# EAGLE board Bio_v4_LCD0_2_pan (EAGLE 7.5.0)
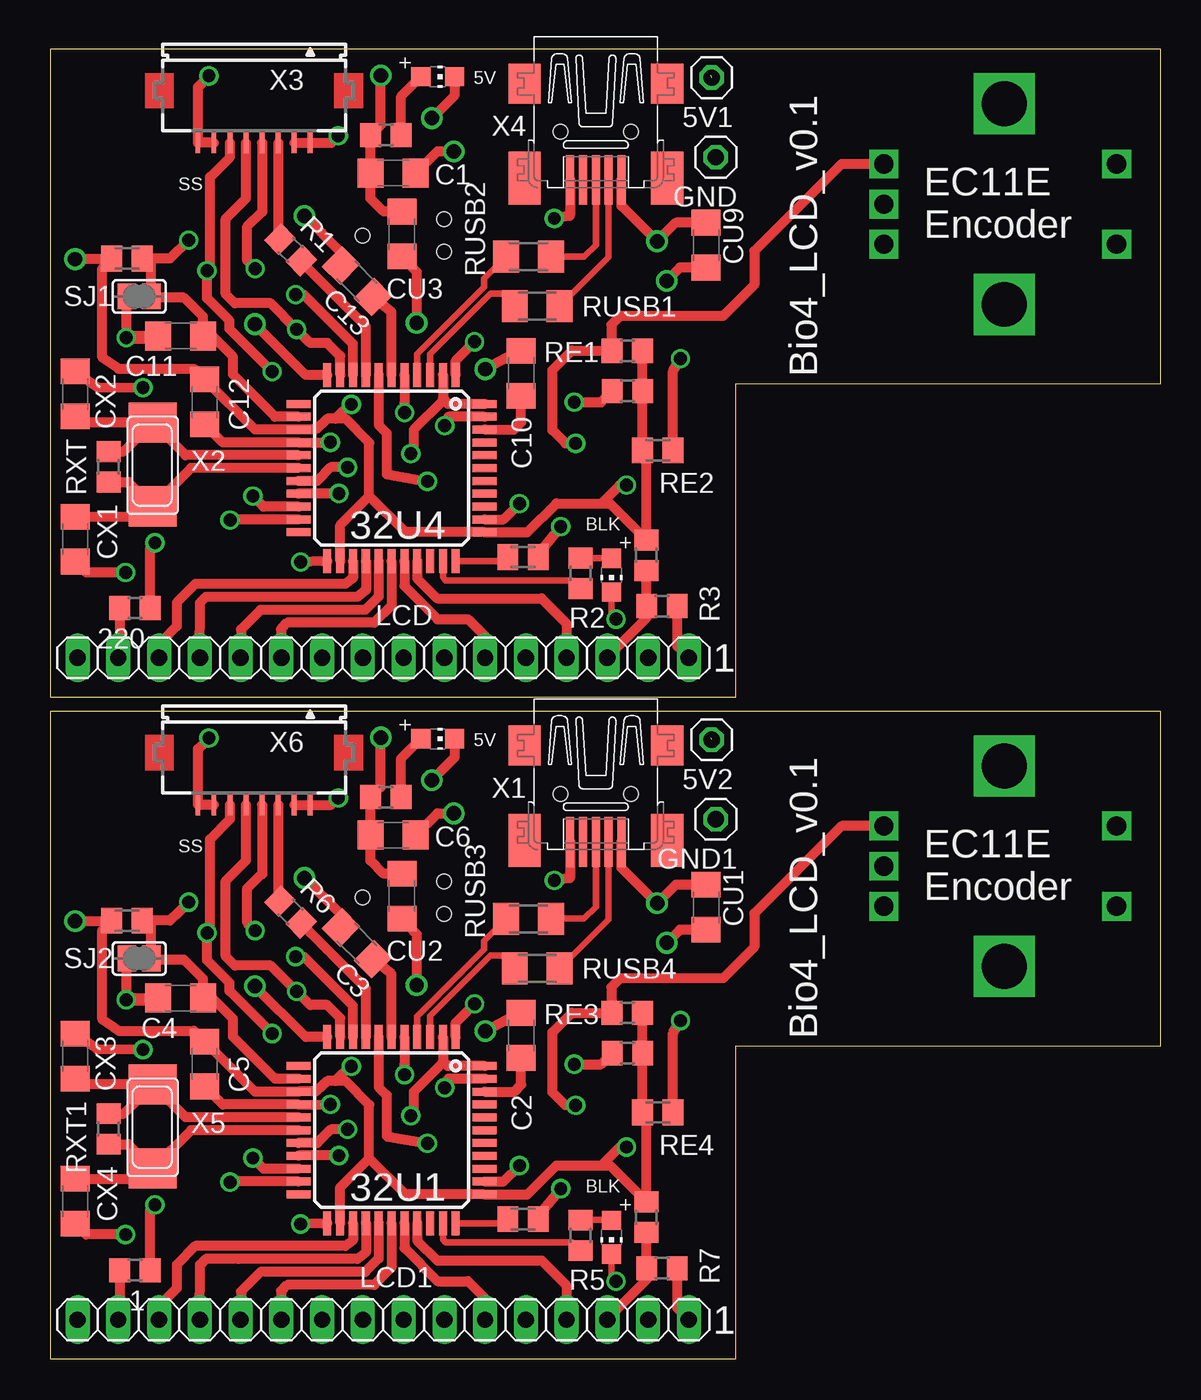
[diagram p0: board, top side]
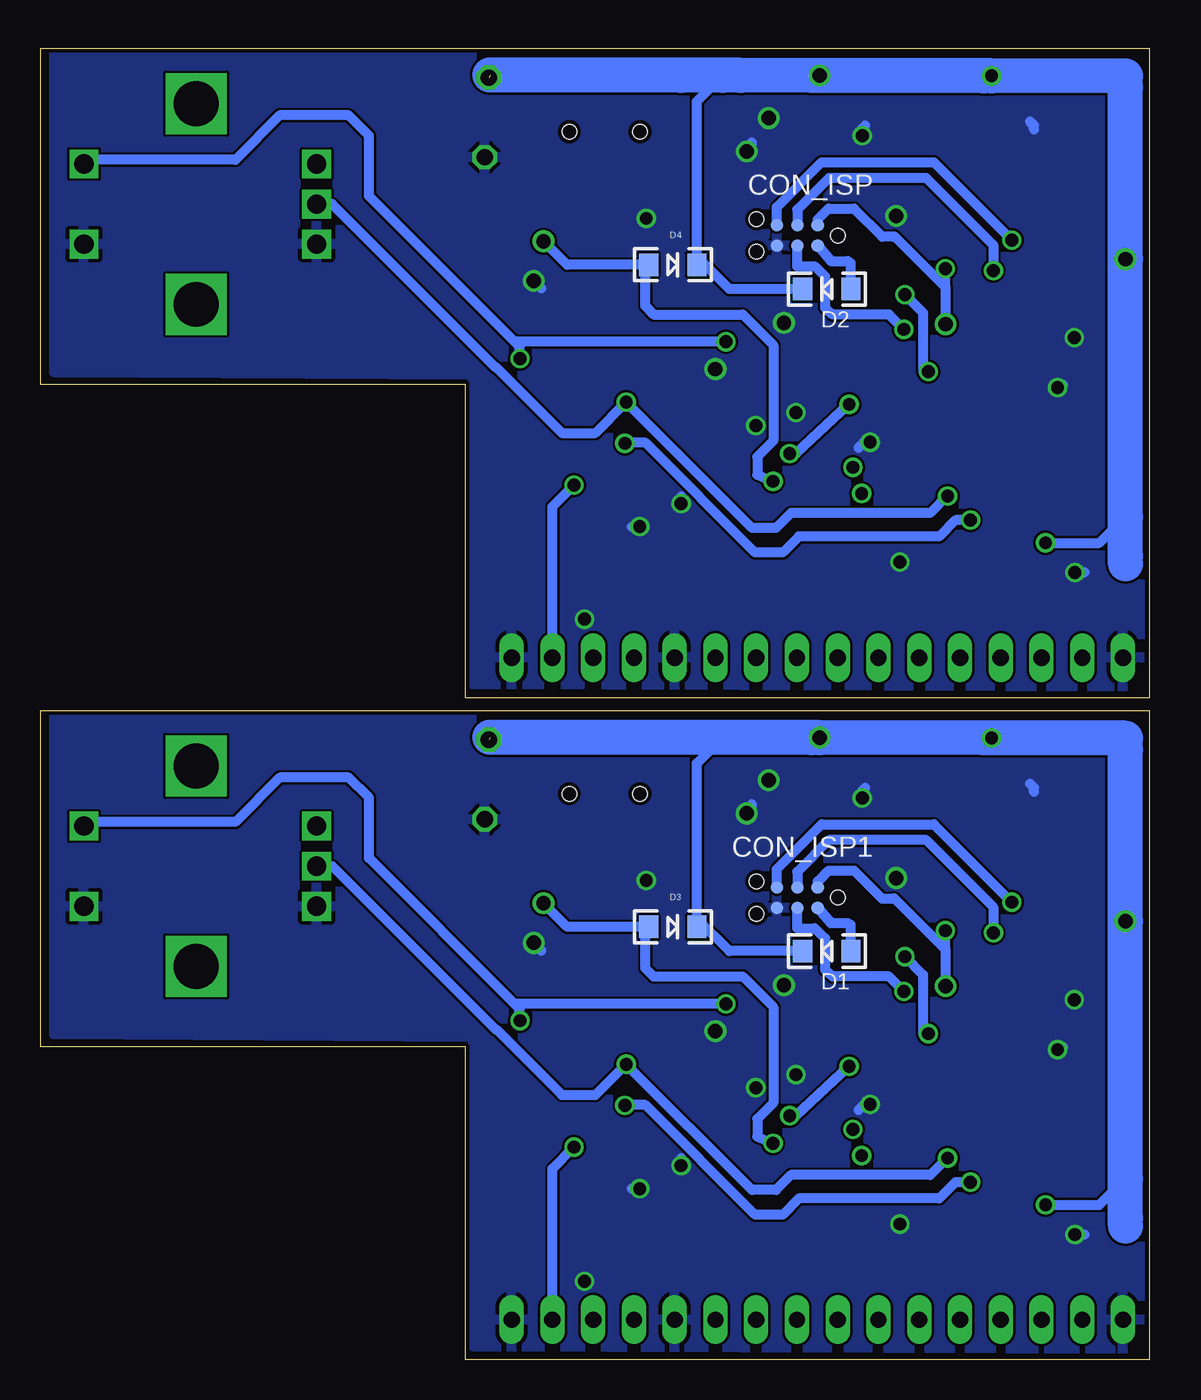
[diagram p1: board, bottom side, seen from below]

Size 69.15 x 81.66 mm. Coordinates in mm from the lower left corner, seen from the top.
Outline: 42.66,41.26 0,41.26 0,81.66 69.15,81.66 69.15,60.78 42.66,60.78 42.66,41.26
Outline: 42.66,0 0,0 0,40.41 69.15,40.41 69.15,19.52 42.66,19.52 42.66,0
Copper layers (1*2*15*16): Top 0.035mm / dielectric 0.2mm / layer 2 0.0175mm / dielectric 1.1mm / layer 15 0.0175mm / dielectric 0.2mm / Bottom 0.035mm
Design rules "SeeedStudio_DRU_no_angle_20130527": minimum track width 6mil, minimum drill 12mil, track to track 6mil, track to pad 6mil, pad to pad 6mil, via to via 6mil, smd to smd 0mil, copper to edge 10mil, drill to drill 10mil, minimum pad ring 6mil, minimum via ring 6mil, stop-mask expansion 2mil, vias tented up to drill 25mil, thermal gap 10mil
Net classes: 0 default: width 0.203 mm; 1 power: width 0.203 mm, drill 0.305 mm, clearance 0.152 mm; 2 VIN: width 0.457 mm; 3 fine: width 0.254 mm; 4 aref: width 0.356 mm
vRestrict: area 8.7,74.7 to 16.8,78.5; area 8.7,33.5 to 16.8,37.3

## Footprints (pad centres in the part's own frame; a part is rotated, then mirrored left to right if it is on the bottom)
R0805 = smd 1.3 x 1.5: 1 -0.95,0; 2 0.95,0
1X01 = drill 1.016 octagon: 1 0,0
TQFP44 = smd 1.5 x 0.5: 1 -5.8,4; 2 -5.8,3.2; 3 -5.8,2.4; 4 -5.8,1.6; 5 -5.8,0.8; 6 -5.8,0; 7 -5.8,-0.8; 8 -5.8,-1.6; 9 -5.8,-2.4; 10 -5.8,-3.2; 11 -5.8,-4; 23 5.8,-4; 24 5.8,-3.2; 25 5.8,-2.4; 26 5.8,-1.6; 27 5.8,-0.8; 28 5.8,0; 29 5.8,0.8; 30 5.8,1.6; 31 5.8,2.4; 32 5.8,3.2; 33 5.8,4 | smd 0.5 x 1.5: 12 -4,-5.8; 13 -3.2,-5.8; 14 -2.4,-5.8; 15 -1.6,-5.8; 16 -0.8,-5.8; 17 0,-5.8; 18 0.8,-5.8; 19 1.6,-5.8; 20 2.4,-5.8; 21 3.2,-5.8; 22 4,-5.8; 34 4,5.8; 35 3.2,5.8; 36 2.4,5.8; 37 1.6,5.8; 38 0.8,5.8; 39 0,5.8; 40 -0.8,5.8; 41 -1.6,5.8; 42 -2.4,5.8; 43 -3.2,5.8; 44 -4,5.8
CHIP-LED0805 = smd 1.2 x 1.2: A 0,-1.05; C 0,1.05
C1206 = smd 1.6 x 1.8: 1 -1.4,0; 2 1.4,0
TC2030-MCP-NL = smd 0.787 x 0.787: 5V 1.27,0.635; GND 3.81,0.635; MISO 1.27,-0.635; MOSI 2.54,0.635; RESET 3.81,-0.635; SCK 2.54,-0.635 | hole 0.889: 0,0; 5.08,-1.016; 5.08,1.016
LED-1206 = smd 1.2 x 1.4: A -1.5,0; C 1.5,0
1X16 = drill 1.016 long: 1 -19.05,0; 2 -16.51,0; 3 -13.97,0; 4 -11.43,0; 5 -8.89,0; 6 -6.35,0; 7 -3.81,0; 8 -1.27,0; 9 1.27,0; 10 3.81,0; 11 6.35,0; 12 8.89,0; 13 11.43,0; 14 13.97,0; 15 16.51,0; 16 19.05,0
M0805 = smd 1.3 x 1.6: 1 -0.95,0; 2 0.95,0
M1206 = smd 1.6 x 2: 1 -1.4,0; 2 1.4,0
SJ = smd 1.168 x 1.6: 1 -0.762,0; 2 0.762,0
EC11E = drill 1.2 square: A -2.5,0; B 0,0; C 2.5,0; D -2.5,14.5; E 2.5,14.5 | drill 2.8 square: P$1 6.25,7.5; P$2 -6.25,7.5
32005-201 = smd 3.1 x 0.5: 1 3,1.6; 2 3,0.8; 3 3,0; 4 3,-0.8; 5 3,-1.6 | smd 2.5 x 2: M1 -3,-4.45; M2 -3,4.45 | smd 3.3 x 2: M3 2.9,4.45; M4 2.9,-4.45 | hole 0.9: 0,2.2; 0,-2.2
NX6035 = smd 2.5 x 3: P$1 2.665,0; P$2 -2.565,0
FH12-08S-1SH = smd 0.3 x 1.3: 1 -3.5,3.25; 2 -2.5,3.25; 3 -1.5,3.25; 4 -0.5,3.25; 5 0.5,3.25; 6 1.5,3.25; 7 2.5,3.25; 8 3.5,3.25

## Placement (x,y rotation side)
1  220  [R0805]  5.25,5.56 180 top
5V1  [1X01]  41.19,79.87 180 top
5V2  [1X01]  41.19,38.61 180 top
32U1  32U4  [TQFP44]  21.24,14.29 270 top
32U4  32U4  [TQFP44]  21.24,55.54 270 top
220  220  [R0805]  5.25,46.82 180 top
BKLD  RED  [CHIP-LED0805]  34.95,48.87 180 top
BKLD1  RED  [CHIP-LED0805]  34.95,7.61 180 top
C1  100nF  [C1206]  21.34,73.93 0 top
C2  100nF  [C1206]  29.32,20.19 90 top
C3  100nF  [C1206]  19.08,25.93 315 top
C4  100nF  [C1206]  8.1,22.52 180 top
C5  100nF  [C1206]  9.6,18.41 90 top
C6  100nF  [C1206]  21.34,32.67 0 top
C10  100nF  [C1206]  29.32,61.45 90 top
C11  100nF  [C1206]  8.1,63.77 180 top
C12  100nF  [C1206]  9.6,59.67 90 top
C13  100nF  [C1206]  19.08,67.19 315 top
CON_ISP  SPI  [TC2030-MCP-NL]  19.43,70.04 180 bottom
CON_ISP1  SPI  [TC2030-MCP-NL]  19.43,28.78 180 bottom
CU1  10uF  [C1206]  40.84,28.18 90 top
CU2  10uF  [C1206]  21.88,28.87 270 top
CU3  10uF  [C1206]  21.88,70.12 270 top
CU9  10uF  [C1206]  40.84,69.43 90 top
CX1  22pF  [C1206]  1.53,51.11 90 top
CX2  22pF  [C1206]  1.52,60.16 270 top
CX3  22pF  [C1206]  1.52,18.9 270 top
CX4  22pF  [C1206]  1.53,9.86 90 top
D1  1N581D1206  [LED-1206]  20.12,25.44 180 bottom
D2  1N581D1206  [LED-1206]  20.12,66.7 180 bottom
D3  1N581D1206  [LED-1206]  29.73,26.95 0 bottom
D4  1N581D1206  [LED-1206]  29.73,68.21 0 bottom
GND  [1X01]  41.45,74.91 180 top
GND1  [1X01]  41.45,33.66 180 top
LCD  [1X16]  20.72,43.73 180 top
LCD1  [1X16]  20.72,2.47 180 top
LDPW1  RED  [CHIP-LED0805]  24.11,38.67 270 top
LDPW5  RED  [CHIP-LED0805]  24.11,79.93 270 top
R1  1k  [R0805]  14.95,69.14 315 top
R2  1k  [R0805]  33.01,48.99 90 top
R3  1k  [R0805]  38.09,46.94 0 top
R4  1k  [R0805]  20.89,35.04 0 top
R5  1k  [R0805]  33.01,7.73 90 top
R6  1k  [R0805]  14.95,27.88 315 top
R7  1k  [R0805]  38.09,5.68 0 top
R13  1k  [R0805]  20.89,76.29 0 top
RE1  5k  [R0805]  35.93,62.85 180 top
RE2  5k  [R0805]  35.94,60.34 180 top
RE3  5k  [R0805]  35.93,21.59 180 top
RE4  5k  [R0805]  35.94,19.09 180 top
RK1  10k  [R0805]  37.12,50.12 270 top
RK2  10k  [M0805]  37.84,56.65 180 top
RK3  10k  [M0805]  29.43,8.74 180 top
RK4  10k  [M0805]  4.76,27.34 180 top
RK5  10k  [R0805]  37.12,8.86 270 top
RK6  10k  [M0805]  4.76,68.6 180 top
RK7  10k  [M0805]  29.43,50 180 top
RK8  10k  [M0805]  37.84,15.39 180 top
RUSB1  22  [M1206]  30.31,65.63 0 top
RUSB2  22  [M1206]  29.77,68.71 0 top
RUSB3  22  [M1206]  29.77,27.45 0 top
RUSB4  22  [M1206]  30.31,24.38 0 top
RXT  1M  [R0805]  3.6,55.62 270 top
RXT1  1M  [R0805]  3.6,14.37 270 top
SJ1  [SJ]  5.51,66.24 0 top
SJ2  [SJ]  5.51,24.98 0 top
U$1  EC11E  [EC11E]  51.92,71.99 270 top
U$2  EC11E  [EC11E]  51.92,30.74 270 top
X1  MINI-USB  [32005-201]  33.97,35.25 270 top
X2  16MHz  [NX6035]  6.36,55.72 90 top
X3  FH12-08S-1SH  [FH12-08S-1SH]  12.67,79.06 180 top
X4  MINI-USB  [32005-201]  33.97,76.51 270 top
X5  16MHz  [NX6035]  6.36,14.46 90 top
X6  FH12-08S-1SH  [FH12-08S-1SH]  12.67,37.81 180 top

## Library data of the parts
1 220 C1-C6 C10-C13 CU1-CU3 CU9 CX1-CX4 R1-R3 R5-R7 RE1-RE4 RK1 RK5 RXT RXT1 = rcl
5V1 5V2 GND GND1 = Headerlibrary
32U1 32U4 BKLD BKLD1 LDPW1 LDPW5 = adafruit
CON_ISP CON_ISP1 D1-D4 LCD LCD1 U$1 U$2 X2 X5 = lpatiny
R4 R13 RK2-RK4 RK6-RK8 RUSB1-RUSB4 = resistor
SJ1 SJ2 = jumper
X1 X4 = con-cypressindustries; OC_FARNELL: unknown; OC_NEWARK: unknown
X3 X6 = con-hirose; OC_FARNELL: unknown; OC_NEWARK: unknown

## Nets
+5V/1 [fine]: 5V1.1 32U4.2 32U4.14 32U4.24 32U4.34 32U4.44 220.1 C1.1 C12.2 CU3.1 D2.C D4.C LCD.2 R13.1 RE1.1 RE2.1 RK1.1 RK2.2 RK6.2 X3.7 X3.8
+5V/2 [fine]: 1.1 5V2.1 32U1.2 32U1.14 32U1.24 32U1.34 32U1.44 C5.2 C6.1 CU2.1 D1.C D3.C LCD1.2 R4.1 RE3.1 RE4.1 RK4.2 RK5.1 RK8.2 X6.7 X6.8
A0: 32U4.36
A1: 32U4.37
A2: 32U4.38
A3: 32U4.39
A4: 32U4.40
A5: 32U4.41
A6: 32U4.25 LCD.14
A7: 32U1.38
A8: 32U1.39
A9: 32U1.40
A10: 32U1.41
A11: 32U1.37
A12: 32U1.36
A13: 32U1.25 LCD1.14
AREF: 32U4.42 C10.1
AREF1: 32U1.42 C2.1
CS_32U1: R6.1 X6.3
CS_32U4: R1.1 X3.3
D5*: 32U4.31
D5*1: 32U1.31
D6*: 32U4.27 LCD.12
D6*1: 32U1.27 LCD1.12
D7*: 32U4.1 RK2.1 U$1.D
D7*1: 32U1.1 RK8.1 U$2.D
D8*: 32U4.28 LCD.11
D8*1: 32U1.28 LCD1.11
D9*: 32U4.29 LCD.6
D9*1: 32U1.29 LCD1.6
D10*: 32U4.30 LCD.4
D10*1: 32U1.30 LCD1.4
D11*: 32U4.12
D11*1: 32U1.12
D12*: 32U4.26 LCD.13
D12*1: 32U1.26 LCD1.13
D13*: 32U4.32 R2.1
D13*1: 32U1.32 R5.1
GND [power]: 32U4.5 32U4.15 32U4.23 32U4.35 32U4.43 BKLD.C C1.2 C10.2 C11.2 C12.1 C13.1 CON_ISP.GND CU3.2 CU9.1 CX1.1 CX2.1 GND.1 LCD.1 LCD.5 LCD.16 LDPW5.C R3.2 RK7.1 SJ1.1 U$1.C U$1.E X3.1 X3.2 X4.5
GND1 [power]: 32U1.5 32U1.15 32U1.23 32U1.35 32U1.43 BKLD1.C C2.2 C3.1 C4.2 C5.1 C6.2 CON_ISP1.GND CU1.1 CU2.2 CX3.1 CX4.1 GND1.1 LCD1.1 LCD1.5 LCD1.16 LDPW1.C R7.2 RK3.1 SJ2.1 U$2.C U$2.E X1.5 X6.1 X6.2
HWB: 32U4.33 RK7.2
HWB1: 32U1.33 RK3.2
ISP+5V: CON_ISP.5V D2.A
ISP+5V1: CON_ISP1.5V D1.A
MISO: 32U4.11 CON_ISP.MISO X3.4
MISO1: 32U1.11 CON_ISP1.MISO X6.4
MOSI: 32U4.10 CON_ISP.MOSI X3.5
MOSI1: 32U1.10 CON_ISP1.MOSI X6.5
N$1: 32U4.6 C13.2
N$2: LCD.3 R3.1 RK1.2
N$3: BKLD.A R2.2
N$4: LDPW1.A R4.2
N$5: BKLD1.A R5.2
N$6: 32U1.17 CX4.2 RXT1.2 X5.P$2
N$7: 32U1.6 C3.2
N$8: LCD1.3 R7.1 RK5.2
N$9: 1.2 LCD1.15
N$11: 220.2 LCD.15
N$12: LDPW5.A R13.2
N$42: 32U4.17 CX1.2 RXT.2 X2.P$2
RESET: 32U4.13 C11.1 CON_ISP.RESET RK6.1 SJ1.2
RESET1: 32U1.13 C4.1 CON_ISP1.RESET RK4.1 SJ2.2
RX: 32U4.20 RE2.2 U$1.B
RX1: 32U1.20 RE4.2 U$2.B
RXLED: 32U4.8 R1.2
RXLED1: 32U1.8 R6.2
SCK: 32U4.9 CON_ISP.SCK X3.6
SCK1: 32U1.9 CON_ISP1.SCK X6.6
SCL: 32U4.18
SCL1: 32U1.18
SDA: 32U4.19
SDA1: 32U1.19
TX: 32U4.21 RE1.2 U$1.A
TX1: 32U1.21 RE3.2 U$2.A
TXLED: 32U4.22
TXLED1: 32U1.22
USB_N: 32U4.3 RUSB1.1
USB_N1: 32U1.3 RUSB4.1
USB_P: 32U4.4 RUSB2.1
USB_P1: 32U1.4 RUSB3.1
USBC_N: RUSB1.2 X4.2
USBC_N1: RUSB4.2 X1.2
USBC_P: RUSB2.2 X4.3
USBC_P1: RUSB3.2 X1.3
VUSB: 32U4.7 CU9.2 D4.A X4.1
VUSB1: 32U1.7 CU1.2 D3.A X1.1
XTAL1: 32U4.16 CX2.2 RXT.1 X2.P$1
XTAL2: 32U1.16 CX3.2 RXT1.1 X5.P$1

## Tracks (layer width: path | path; a pad name or v marks a point on that pad's centre or on a via)
+5V/1  (via drill 0.8, 0.8 pad 0.81, 0.9, 0.9 pad 0.61)  (1 unrouted)
  Top 0.61: 32U4.24 18.04,51.98 19.85,53.79 | 19.85,53.79 19.85,57.12 18.36,58.61 17.73,58.61 | 17.73,58.61 17.23,58.61 16.51,57.95 15.45,57.95 32U4.14 12.73,57.94 C12.2 8.93,61.74 4.23,61.74 3.21,62.44 3.21,68 3.78,68.56 | 19.85,53.79 22.11,51.54 32U4.34 29.71,51.54 31.51,53.34 34.33,53.34 | 32U4.44 24.76,59.54 24.44,59.86 | 32U4.2 24.44,59.86 | 24.44,59.86 24.44,59.76 22.62,57.94 22.62,56.63 v22.44,56.44 | v18.74,59.52 18.74,59.62 17.73,58.61 | RK6.2 3.78,68.56 | 3.78,68.56 v1.52,68.56 | v20.56,80.01 20.56,76.92 R13.1 C1.1 19.93,72.34 20.75,71.52 CU3.1 | 34.33,53.34 34.84,53.34 RK1.1 | 220.1 6.2,50.59 v6.49,50.89 | RE1.1 RE2.1 RK2.2 37.12,56.42 RK1.1 | 36.89,51.29 RK1.1 | v35.88,54.49 35.47,54.49 34.33,53.34 | X3.7 X3.8 9.17,79.3 v9.86,79.98
  Bottom 0.61: v22.44,56.44 22.04,56.44 v18.74,59.52 | 1.52,79.26 1.52,79.61 1.88,79.97 | v20.56,80.01 v20.57,80.01 21.06,80.01 | v6.49,50.89 3.15,50.89 1.52,52.52 | LCD.2 37.23,53.14 v35.88,54.49 | D4.C 28.23,68.72 | 28.23,68.72 28.23,78.4 26.61,80.02 | D2.C 26.21,66.7 28.23,68.72 | v9.86,79.98 10.37,79.98
  Bottom 2.184: 1.52,49.57 1.52,50.06 1.52,52.52 v1.52,68.56 1.52,79.26 1.52,79.97 1.88,79.97 v9.86,79.98 10.37,79.98 v20.56,80.01 21.06,80.01 25.49,80.02 26.61,80.02 29.21,80.02 34.88,80.03 41.13,80.03
+5V/2  (via drill 0.8, 0.8 pad 0.81, 0.9, 0.9 pad 0.61)  (1 unrouted)
  Top 0.61: 32U1.24 18.04,10.72 19.85,12.54 | 19.85,12.54 19.85,15.86 18.36,17.35 17.73,17.35 | 17.73,17.35 17.23,17.35 16.51,16.69 15.45,16.69 32U1.14 12.73,16.69 C5.2 8.93,20.48 4.23,20.48 3.21,21.18 3.21,26.74 3.78,27.3 | 19.85,12.54 22.11,10.29 32U1.34 29.71,10.29 31.51,12.09 34.33,12.09 | 32U1.44 24.76,18.29 24.44,18.6 | 32U1.2 24.44,18.6 | 24.44,18.6 24.44,18.5 22.62,16.68 22.62,15.37 v22.44,15.19 | v18.74,18.26 18.74,18.36 17.73,17.35 | RK4.2 3.78,27.3 | 3.78,27.3 v1.52,27.3 | v20.56,38.75 20.56,35.66 R4.1 C6.1 19.93,31.09 20.75,30.27 CU2.1 | 34.33,12.09 34.84,12.09 RK5.1 | 1.1 6.2,9.34 v6.49,9.63 | RE3.1 RE4.1 RK8.2 37.12,15.16 RK5.1 | 36.89,10.04 RK5.1 | v35.88,13.23 35.47,13.23 34.33,12.09 | X6.7 X6.8 9.17,38.04 v9.86,38.73
  Bottom 0.61: v22.44,15.19 22.04,15.19 v18.74,18.26 | 1.52,38 1.52,38.35 1.88,38.71 | v20.56,38.75 v20.57,38.75 21.06,38.75 | v6.49,9.63 3.15,9.63 1.52,11.26 | LCD1.2 37.23,11.88 v35.88,13.23 | D3.C 28.23,27.46 | 28.23,27.46 28.23,37.14 26.61,38.76 | D1.C 26.21,25.44 28.23,27.46 | v9.86,38.73 10.37,38.73
  Bottom 2.184: 1.52,8.31 1.52,8.8 1.52,11.26 v1.52,27.3 1.52,38 1.52,38.71 1.88,38.71 v9.86,38.73 10.37,38.73 v20.56,38.75 21.06,38.75 25.49,38.76 26.61,38.76 29.21,38.76 34.88,38.77 41.13,38.77
A6
  Top 0.61: 32U4.25 18.84,48.68 18.37,48.33 9.02,48.33 7.85,47.16 7.85,45.69 6.93,44.77 6.93,43.58 LCD.14
A13
  Top 0.61: 32U1.25 18.84,7.42 18.37,7.07 9.02,7.07 7.85,5.91 7.85,4.44 6.93,3.52 6.93,2.32 LCD1.14
AREF
  Top 0.61: 32U4.42 28.86,57.94 28.87,57.93 29.32,58.39 C10.1
AREF1
  Top 0.61: 32U1.42 28.86,16.69 28.87,16.67 29.32,17.13 C2.1
CS_32U1
  Top 0.61: X6.3 14.17,28.65 R6.1
CS_32U4
  Top 0.61: X3.3 14.17,69.91 R1.1
D6*
  Top 0.61: 32U4.27 20.44,47.55 19.6,46.71 13.07,46.71 11.86,45.49 11.86,43.44 LCD.12
D6*1
  Top 0.61: 32U1.27 20.44,6.29 19.6,5.45 13.07,5.45 11.86,4.24 11.86,2.18 LCD1.12
D7*  (via drill 0.8)
  Top 0.61: 32U4.1 25.24,62.24 v26.42,63.41 | RK2.1 38.79,61.6 v39.25,62.37
  Bottom 0.61: v26.42,63.41 39.58,63.41 | 39.58,63.41 48.66,72.5 48.66,76.26 49.92,77.52 54.22,77.52 56.98,74.76 66.16,74.76 U$1.D | v39.25,62.37 39.27,63.11 39.58,63.41
D7*1  (via drill 0.8)
  Top 0.61: 32U1.1 25.24,20.98 v26.42,22.16 | RK8.1 38.79,20.34 v39.25,21.11
  Bottom 0.61: v26.42,22.16 39.58,22.16 | 39.58,22.16 48.66,31.24 48.66,35.01 49.92,36.26 54.22,36.26 56.98,33.5 66.16,33.5 U$2.D | v39.25,21.11 39.27,21.85 39.58,22.16
D8*
  Top 0.61: 32U4.28 21.24,46.99 20.16,45.91 14.75,45.91 14.35,45.51 14.35,43.74 LCD.11
D8*1
  Top 0.61: 32U1.28 21.24,5.73 20.16,4.65 14.75,4.65 14.35,4.25 14.35,2.49 LCD1.11
D9*
  Top 0.61: 32U4.29 22.04,48.2 24.1,46.14 26,46.14 27.09,45.04 27.09,43.75 LCD.6
D9*1
  Top 0.61: 32U1.29 22.04,6.94 24.1,4.88 26,4.88 27.09,3.79 27.09,2.49 LCD1.6
D10*
  Top 0.61: 32U4.30 22.84,48.66 24.08,47.42 30.59,47.42 32.14,45.87 LCD.4
D10*1
  Top 0.61: 32U1.30 22.84,7.4 24.08,6.16 30.59,6.16 32.14,4.61 32.14,2.48 LCD1.4
D12*
  Top 0.61: 32U4.26 19.64,47.94 19.12,47.51 11.68,47.51 9.66,47.51 9.31,47.16 LCD.13
D12*1
  Top 0.61: 32U1.26 19.64,6.68 19.12,6.25 11.68,6.26 9.66,6.26 9.31,5.91 LCD1.13
D13*
  Top 0.406: 32U4.32 24.44,48.75 24.62,48.54 32.48,48.54 R2.1
D13*1
  Top 0.406: 32U1.32 24.44,7.49 24.62,7.28 32.48,7.28 R5.1
GND  (via drill 0.8, 0.8 pad 0.81, 0.9, 0.9 pad 0.81)
  Top 0.406: BKLD.C 34.95,46.4 v35.22,46.13
  Top 0.61: v17.43,57.15 17.35,57.13 32U4.15 10.73,57.14 C12.1 | 32U4.5 22.04,59.62 v22.05,59 | CX2.1 2.89,60.6 v5.75,60.56 | 32U4.23 16.97,49.73 v15.58,49.69 | v4.66,49.04 2.21,49.04 CX1.1 | 32U4.43 24.78,58.74 v24.55,58.19 | C10.2 29.33,62.91 v27.07,61.71 | SJ1.1 4.7,66.19 v4.7,63.67 | LDPW5.C 25.16,78.76 v23.75,77.35 | C1.2 24.09,75.28 v25.12,75.28 | CU3.2 22.8,67.77 v22.8,64.58 | X4.5 32.35,71.26 v31.38,71.1 | CU9.1 39.21,68.03 v38.39,67.21 | 32U4.35 28.22,52.34 v29.21,53.33 | RK7.1 30.56,50.38 v31.79,51.9 | LCD.1 39.04,44.45 R3.2 | C13.1 18.09,68.98 v15.82,71.26 | X3.2 X3.1 17.48,75.81 v17.92,76.25
  Top 0.813: C11.2 6.54,63.68 v4.7,63.67
  Bottom 0.406: v35.22,46.13 35.22,46.21 35.34,46.33
  Bottom 0.61: v17.43,57.15 17.82,57.14 18.16,56.81 | v4.66,49.04 4.07,49.04 | v5.75,60.56 5.54,60.58 5.41,60.72 | 7.22,76.63 7.22,76.9 7.47,77.14 | v23.75,77.35 23.89,77.35 23.91,77.37 | v25.12,75.28 24.81,75.59 24.81,75.85 | v22.8,64.58 23.07,64.79 22.97,64.55 | v38.39,67.21 | v38.39,67.21 37.92,66.74 | v29.21,53.33 29.21,53.8 | v31.79,51.9 32.27,51.9 | v17.92,76.25 17.92,76.7 17.73,76.89
  pour Bottom: 0.44,81.12 0.4,81.14 0.67,41.89 42.17,42.05 42.17,61.32 68.28,61.5 68.28,81.41 1.7,81.51 0.68,81.38
GND1  (via drill 0.8, 0.8 pad 0.81, 0.9, 0.9 pad 0.81)
  Top 0.406: BKLD1.C 34.95,5.14 v35.22,4.87
  Top 0.61: v17.43,15.9 17.35,15.87 32U1.15 10.73,15.89 C5.1 | 32U1.5 22.04,18.36 v22.05,17.74 | CX3.1 2.89,19.34 v5.75,19.31 | 32U1.23 16.97,8.48 v15.58,8.43 | v4.66,7.78 2.21,7.78 CX4.1 | 32U1.43 24.78,17.49 v24.55,16.93 | C2.2 29.33,21.65 v27.07,20.45 | SJ2.1 4.7,24.93 v4.7,22.41 | LDPW1.C 25.16,37.5 v23.75,36.09 | C6.2 24.09,34.02 v25.12,34.02 | CU2.2 22.8,26.51 v22.8,23.32 | X1.5 32.35,30 v31.38,29.84 | CU1.1 39.21,26.78 v38.39,25.96 | 32U1.35 28.22,11.09 v29.21,12.08 | RK3.1 30.56,9.13 v31.79,10.64 | LCD1.1 39.04,3.2 R7.2 | C3.1 18.09,27.72 v15.82,30 | X6.2 X6.1 17.48,34.55 v17.92,34.99
  Top 0.813: C4.2 6.54,22.42 v4.7,22.41
  Bottom 0.406: v35.22,4.87 35.22,4.95 35.34,5.07
  Bottom 0.61: v17.43,15.9 17.82,15.88 18.16,15.55 | v4.66,7.78 4.07,7.78 | v5.75,19.31 5.54,19.32 5.41,19.46 | 7.22,35.37 7.22,35.64 7.47,35.88 | v23.75,36.09 23.89,36.09 23.91,36.11 | v25.12,34.02 24.81,34.34 24.81,34.59 | v22.8,23.32 23.07,23.53 22.97,23.29 | v38.39,25.96 | v38.39,25.96 37.92,25.48 | v29.21,12.08 29.21,12.54 | v31.79,10.64 32.27,10.64 | v17.92,34.99 17.92,35.44 17.73,35.63
  pour Bottom: 0.44,39.86 0.4,39.89 0.67,0.63 42.17,0.79 42.17,20.07 68.28,20.25 68.28,40.15 1.7,40.25 0.68,40.13
HWB
  Top 0.406: 32U4.33 28.23,49.74 RK7.2
HWB1
  Top 0.406: 32U1.33 28.23,8.49 RK3.2
ISP+5V
  Bottom 0.61: CON_ISP.5V 19.87,68.45 18.83,68.45 18.64,68.34 18.64,66.71 D2.A
ISP+5V1
  Bottom 0.61: CON_ISP1.5V 19.87,27.19 18.83,27.19 18.64,27.08 18.64,25.46 D1.A
MISO  (via drill 0.8, 0.9 pad 0.61)
  Top 0.61: 32U4.11 15.89,61.34 v12.72,64.51 | X3.4 13.19,75.8 13.19,71.49 13.14,71.49 12.26,70.61 12.26,68.46 v12.74,67.98
  Bottom 0.61: v12.72,64.51 12.72,66.79 12.74,66.81 | 12.74,66.81 15.92,69.99 15.96,69.96 16.67,69.96 18.44,71.72 20.03,71.72 20.7,71.05 CON_ISP.MISO | 12.74,66.81 v12.74,67.98
MISO1  (via drill 0.8, 0.9 pad 0.61)
  Top 0.61: 32U1.11 15.89,20.09 v12.72,23.25 | X6.4 13.19,34.54 13.19,30.24 13.14,30.24 12.26,29.35 12.26,27.2 v12.74,26.72
  Bottom 0.61: v12.72,23.25 12.72,25.54 12.74,25.55 | 12.74,25.55 15.92,28.74 15.96,28.7 16.67,28.7 18.44,30.46 20.03,30.46 20.7,29.79 CON_ISP1.MISO | 12.74,25.55 v12.74,26.72
MOSI  (via drill 0.8)
  Top 0.61: 32U4.10 18.04,62.53 17.23,63.34 16.17,63.34 v15.32,64.18 13.7,65.81 11.47,65.81 10.91,66.37 10.91,71.09 12.17,72.35 X3.5
  Bottom 0.61: CON_ISP.MOSI 21.97,68.12 20.87,68.12 20.25,67.49 20.25,65.54 20.16,65.45 19.78,65.11 16.25,65.11 v15.32,64.18
MOSI1  (via drill 0.8)
  Top 0.61: 32U1.10 18.04,21.27 17.23,22.08 16.17,22.08 v15.32,22.93 13.7,24.55 11.47,24.55 10.91,25.11 10.91,29.83 12.17,31.09 X6.5
  Bottom 0.61: CON_ISP1.MOSI 21.97,26.86 20.87,26.86 20.25,26.24 20.25,24.28 20.16,24.19 19.78,23.85 16.25,23.85 v15.32,22.93
N$1
  Top 0.61: 32U4.6 21.24,65.27 C13.2
N$2
  Top 0.61: LCD.3 34.69,43.78 37.14,46.24 R3.1 37.12,46.97 RK1.2
N$3
  Top 0.406: R2.2 34.93,49.94 BKLD.A
N$4
  Top 0.61: R4.2 21.84,37.45 LDPW1.A
N$5
  Top 0.406: R5.2 34.93,8.68 BKLD1.A
N$6
  Top 0.61: 32U1.17 8.75,14.29 X5.P$2 | CX4.2 6.37,11.26 6.96,11.85 6.41,11.85 X5.P$2 | RXT1.2 4.84,13.42 X5.P$2
N$7
  Top 0.61: 32U1.6 21.24,24.01 C3.2
N$8
  Top 0.61: LCD1.3 34.69,2.53 37.14,4.98 R7.1 37.12,5.71 RK5.2
N$9
  Top 0.61: 1.2 4.3,2.23 LCD1.15
N$11
  Top 0.61: 220.2 4.3,43.49 LCD.15
N$12
  Top 0.61: R13.2 21.84,78.71 LDPW5.A
N$42
  Top 0.61: 32U4.17 8.75,55.54 X2.P$2 | CX1.2 6.37,52.51 6.96,53.1 6.41,53.1 X2.P$2 | RXT.2 4.84,54.67 X2.P$2
RESET  (via drill 0.8 pad 0.81)
  Top 0.61: 32U4.13 13.98,58.74 11.35,61.37 11.35,62.49 10.05,63.79 9.51,63.79 C11.1 | 9.62,63.65 C11.1 | C11.1 9.49,64.98 8.31,66.16 6.35,66.16 SJ1.2 6.27,68.6 RK6.1 7.42,68.6 v8.59,69.75
  Bottom 0.61: CON_ISP.RESET 23.24,71.81 20.45,74.59 13.44,74.59 v8.59,69.75
RESET1  (via drill 0.8 pad 0.81)
  Top 0.61: 32U1.13 13.98,17.49 11.35,20.11 11.35,21.23 10.05,22.53 9.51,22.53 C4.1 | 9.62,22.39 C4.1 | C4.1 9.49,23.72 8.31,24.9 6.35,24.9 SJ2.2 6.27,27.34 RK4.1 7.42,27.34 v8.59,28.49
  Bottom 0.61: CON_ISP1.RESET 23.24,30.55 20.45,33.34 13.44,33.34 v8.59,28.49
RX  (via drill 0.8)
  Top 0.61: 32U4.20 13.26,53.14 v12.6,53.8 | v32.63,59.65 34.3,59.65 RE2.2
  Bottom 0.61: v12.6,53.8 12.64,53.8 13.68,52.75 22.35,52.75 23.29,51.81 24.79,51.81 v32.63,59.65 34.55,57.73 36.63,57.73 40.71,61.81 40.76,61.81 50.95,71.99 U$1.B
RX1  (via drill 0.8)
  Top 0.61: 32U1.20 13.26,11.89 v12.6,12.54 | v32.63,18.39 34.3,18.39 RE4.2
  Bottom 0.61: v12.6,12.54 12.64,12.54 13.68,11.5 22.35,11.5 23.29,10.56 24.79,10.56 v32.63,18.39 34.55,16.47 36.63,16.47 40.71,20.55 40.76,20.55 50.95,30.74 U$2.B
RXLED
  Top 0.61: 32U4.8 19.64,64.36 15.62,68.38 R1.2
RXLED1
  Top 0.61: 32U1.8 19.64,23.11 15.62,27.12 R6.2
SCK  (via drill 0.8)
  Top 0.61: 32U4.9 18.84,63.27 15.76,66.36 v15.26,66.36 | X3.6 11.17,74.92 9.92,73.67 9.92,68.02 v9.74,67.84 9.74,66.13 11.15,64.72 11.15,64.21 v13.8,61.56
  Bottom 0.61: CON_ISP.SCK 21.96,71.65 19.99,73.62 13.94,73.62 9.76,69.44 v9.74,67.84 | v15.26,66.36 14.13,65.22 14.13,61.56 v13.8,61.56
SCK1  (via drill 0.8)
  Top 0.61: 32U1.9 18.84,22.02 15.76,25.1 v15.26,25.1 | X6.6 11.17,33.66 9.92,32.41 9.92,26.77 v9.74,26.58 9.74,24.87 11.15,23.47 11.15,22.96 v13.8,20.3
  Bottom 0.61: CON_ISP1.SCK 21.96,30.39 19.99,32.36 13.94,32.36 9.76,28.18 v9.74,26.58 | v15.26,25.1 14.13,23.96 14.13,20.3 v13.8,20.3
SCL  (via drill 0.8 pad 0.81)
  Top 0.61: v18.5,55.59 17.44,55.59 16.61,54.74 15.45,54.74 32U4.18
  Bottom 0.61: v18.5,55.59 18.5,55.42
SCL1  (via drill 0.8 pad 0.81)
  Top 0.61: v18.5,14.33 17.44,14.33 16.61,13.49 15.45,13.49 32U1.18
  Bottom 0.61: v18.5,14.33 18.5,14.16
SDA  (via drill 0.8 pad 0.81)
  Top 0.61: v17.95,53.96 15.46,53.96 32U4.19
  Bottom 0.61: v17.95,53.96 17.99,53.96
SDA1  (via drill 0.8 pad 0.81)
  Top 0.61: v17.95,12.7 15.46,12.7 32U1.19
  Bottom 0.61: v17.95,12.7 17.99,12.7
TX  (via drill 0.8)
  Top 0.61: 32U4.21 11.22,52.34 v11.17,52.3 | v32.71,57.09 32.08,57.09 31.26,57.9 31.26,61.64 32.48,62.86 34.97,62.86 RE1.2 34.94,62.89 34.94,64.47 35.49,65.01 41.9,65.01 43.85,66.96 43.85,69.06 49.28,74.49 U$1.A
  Bottom 0.61: v11.17,52.3 12.11,52.3 13.12,51.29 21.87,51.29 22.88,50.28 24.6,50.28 31.44,57.12 32.69,57.12 v32.71,57.09
TX1  (via drill 0.8)
  Top 0.61: 32U1.21 11.22,11.09 v11.17,11.04 | v32.71,15.83 32.08,15.83 31.26,16.64 31.26,20.39 32.48,21.61 34.97,21.61 RE3.2 34.94,21.63 34.94,23.21 35.49,23.75 41.9,23.75 43.85,25.7 43.85,27.8 49.28,33.24 U$2.A
  Bottom 0.61: v11.17,11.04 12.11,11.04 13.12,10.03 21.87,10.03 22.88,9.02 24.6,9.02 31.44,15.86 32.69,15.86 v32.71,15.83
USB_N
  Top 0.406: 32U4.3 23.64,62.65 27.41,66.42 28.12,66.42 RUSB1.1
USB_N1
  Top 0.406: 32U1.3 23.64,21.39 27.41,25.16 28.12,25.16 RUSB4.1
USB_P
  Top 0.406: 32U4.4 22.84,62.64 27.01,66.82 27.01,67.35 RUSB2.1
USB_P1
  Top 0.406: 32U1.4 22.84,21.39 27.01,25.56 27.01,26.09 RUSB3.1
USBC_N
  Top 0.406: X4.2 34.77,68.69 RUSB1.2
USBC_N1
  Top 0.406: X1.2 34.77,27.43 RUSB4.2
USBC_P
  Top 0.406: X4.3 33.97,69.45 33.25,68.73 31.19,68.73 RUSB2.2
USBC_P1
  Top 0.406: X1.3 33.97,28.19 33.25,27.47 31.19,27.47 RUSB3.2
VUSB  (via drill 0.8 pad 0.81, 0.9)
  Top 0.61: 32U4.7 20.44,58.22 20.94,57.72 20.94,55.17 v23.48,54.71 | X4.1 35.57,71.89 v37.78,69.68 38.94,70.83 CU9.2
  Bottom 0.61: 23.47,54.64 v23.48,54.71 24.46,55.14 24.46,56.25 23.46,57.25 23.46,63.21 25.36,65.11 30.92,65.11 31.44,65.63 31.44,68 D4.A | D4.A 36.31,68.21 v37.78,69.68 | D4.A 31.23,68.14
VUSB1  (via drill 0.8 pad 0.81, 0.9)
  Top 0.61: 32U1.7 20.44,16.97 20.94,16.46 20.94,13.91 v23.48,13.46 | X1.1 35.57,30.64 v37.78,28.42 38.94,29.58 CU1.2
  Bottom 0.61: 23.47,13.38 v23.48,13.46 24.46,13.88 24.46,14.99 23.46,15.99 23.46,21.95 25.36,23.85 30.92,23.85 31.44,24.38 31.44,26.74 D3.A | D3.A 36.31,26.95 v37.78,28.42 | D3.A 31.23,26.88
XTAL1
  Top 0.61: 32U4.16 8.4,56.34 X2.P$1 | X2.P$1 1.9,58.39 CX2.2 | RXT.1 4.55,56.57 X2.P$1
XTAL2
  Top 0.61: 32U1.16 8.4,15.09 X5.P$1 | X5.P$1 1.9,17.13 CX3.2 | RXT1.1 4.55,15.32 X5.P$1

## Text on the board
tNames: 5V | SS | EC11E / Encoder | Bio4_LCD_v0.1 | BLK | 1 | 5V | SS | EC11E / Encoder | Bio4_LCD_v0.1 | BLK | 1
tValues: Screen / v0.1
203bmp: C:/Users/G/Pictures/logo_epfl.bmp